# EAGLE board main_board_rv2 (EAGLE 9.6.2)
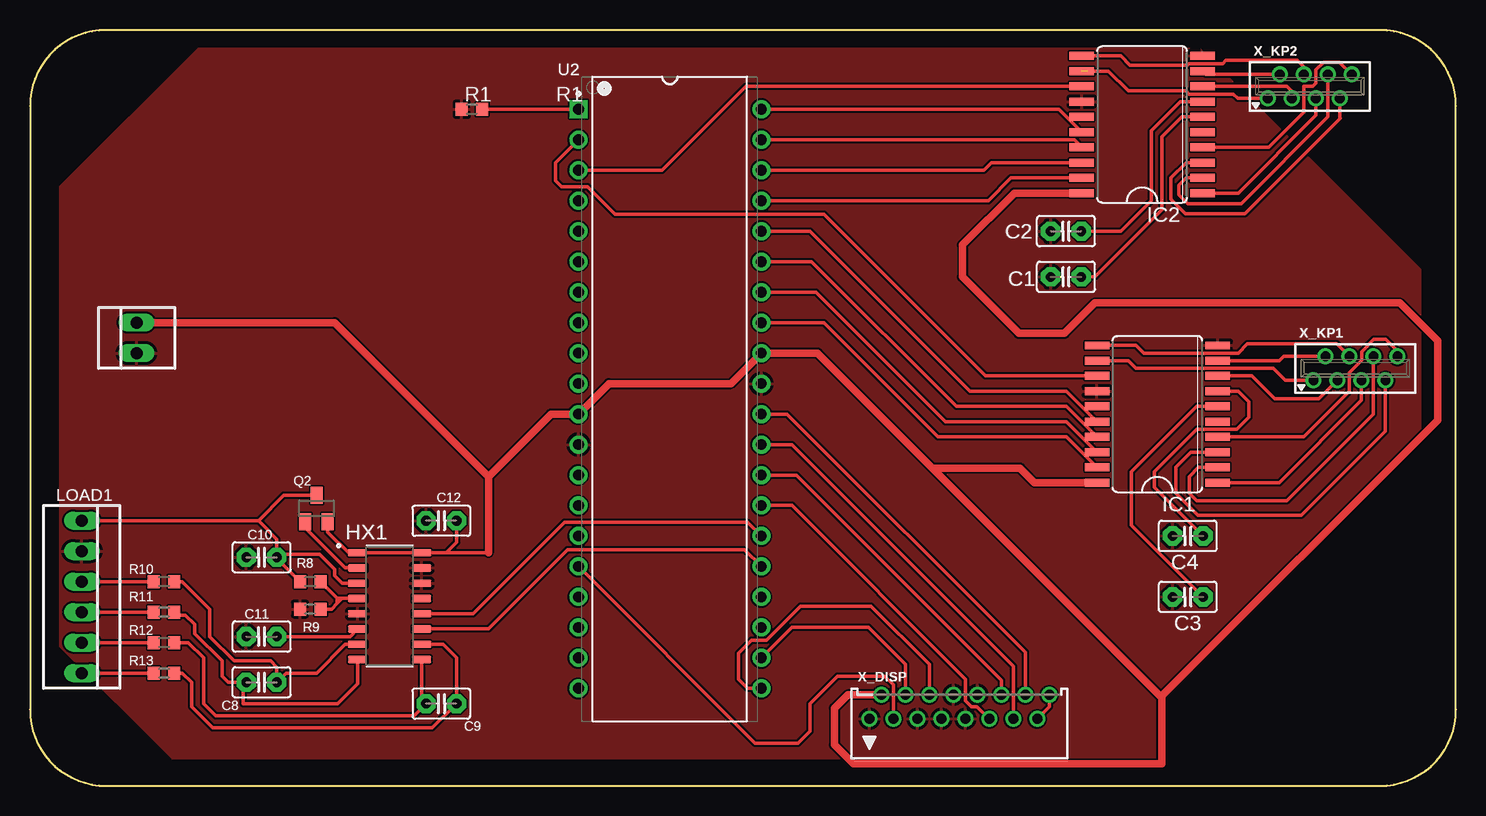
[diagram p0: board, top side]

Size 118.87 x 62.99 mm. Coordinates in mm from the lower left corner, seen from the top.
Outline: 112.52,62.99 6.35,62.99 arc90 0,56.64 0,6.35 arc90 6.35,0 112.52,0 arc90 118.87,6.35 118.87,56.64 arc90 112.52,62.99
Copper layers (1*16): Top 0.035mm / dielectric 1.5mm / Bottom 0.035mm
Design rules "default": minimum track width 6mil, minimum drill 0.35mm, track to track 6mil, track to pad 6mil, pad to pad 6mil, via to via 6mil, smd to smd 6mil, copper to edge 40mil, drill to drill 6mil, minimum pad ring 10mil, minimum via ring 8mil, stop-mask expansion 4mil, vias tented up to drill 0mil, thermal gap 10mil

## Footprints (pad centres in the part's own frame; a part is rotated, then mirrored left to right if it is on the bottom)
C2.5-2 = drill 0.813 pad 1.6 octagon: 1 -1.27,0; 2 1.27,0
SOP127P600X180-16N = smd 1.58 x 0.59: 1 -2.67,4.445; 2 -2.67,3.175; 3 -2.67,1.905; 4 -2.67,0.635; 5 -2.67,-0.635; 6 -2.67,-1.905; 7 -2.67,-3.175; 8 -2.67,-4.445; 9 2.67,-4.445; 10 2.67,-3.175; 11 2.67,-1.905; 12 2.67,-0.635; 13 2.67,0.635; 14 2.67,1.905; 15 2.67,3.175; 16 2.67,4.445
SO20W = smd 0.66 x 2.032: 1 -5.715,-5.029; 2 -4.445,-5.029; 3 -3.175,-5.029; 4 -1.905,-5.029; 5 -0.635,-5.029; 6 0.635,-5.029; 7 1.905,-5.029; 8 3.175,-5.029; 9 4.445,-5.029; 10 5.715,-5.029; 11 5.715,5.029; 12 4.445,5.029; 13 3.175,5.029; 14 1.905,5.029; 15 0.635,5.029; 16 -0.635,5.029; 17 -1.905,5.029; 18 -3.175,5.029; 19 -4.445,5.029; 20 -5.715,5.029
22-23-2061 = drill 1 long: 1 -6.35,0; 2 -3.81,0; 3 -1.27,0; 4 1.27,0; 5 3.81,0; 6 6.35,0
SOT23 = smd 1 x 1.4: 1 -0.95,-1.1; 2 0.95,-1.1; 3 0,1.1
R0603 = smd 1 x 1.1: 1 -0.85,0; 2 0.85,0
MICROCHIP_PIC18F46K20-I-P_0 = drill 0.9 pad 1.5 square: 1 -7.62,24.13 | drill 0.9 pad 1.5: 2 -7.62,21.59; 3 -7.62,19.05; 4 -7.62,16.51; 5 -7.62,13.97; 6 -7.62,11.43; 7 -7.62,8.89; 8 -7.62,6.35; 9 -7.62,3.81; 10 -7.62,1.27; 11 -7.62,-1.27; 12 -7.62,-3.81; 13 -7.62,-6.35; 14 -7.62,-8.89; 15 -7.62,-11.43; 16 -7.62,-13.97; 17 -7.62,-16.51; 18 -7.62,-19.05; 19 -7.62,-21.59; 20 -7.62,-24.13; 21 7.62,-24.13; 22 7.62,-21.59; 23 7.62,-19.05; 24 7.62,-16.51; 25 7.62,-13.97; 26 7.62,-11.43; 27 7.62,-8.89; 28 7.62,-6.35; 29 7.62,-3.81; 30 7.62,-1.27; 31 7.62,1.27; 32 7.62,3.81; 33 7.62,6.35; 34 7.62,8.89; 35 7.62,11.43; 36 7.62,13.97; 37 7.62,16.51; 38 7.62,19.05; 39 7.62,21.59; 40 7.62,24.13
FH21-16S-1DS = drill 0.813: 1 -7.5,0; 2 -6.5,2; 3 -5.5,0; 4 -4.5,2; 5 -3.5,0; 6 -2.5,2; 7 -1.5,0; 8 -0.5,2; 9 0.5,0; 10 1.5,2; 11 2.5,0; 12 3.5,2; 13 4.5,0; 14 5.5,2; 15 6.5,0; 16 7.5,2
FH21-8S-1DSA = drill 0.813: 1 -3.5,-1; 2 -2.5,1; 3 -1.5,-1; 4 -0.5,1; 5 0.5,-1; 6 1.5,1; 7 2.5,-1; 8 3.5,1
22-23-2021 = drill 1 long: 1 -1.27,0; 2 1.27,0

## Placement (x,y rotation side)
C1  0.1uF  [C2.5-2]  86.36,42.42 180 top
C2  1 uF  [C2.5-2]  86.36,46.23 180 top
C3  0.1uF  [C2.5-2]  96.52,15.75 180 top
C4  1 uF  [C2.5-2]  96.52,20.83 180 top
C8  0.1uF  [C2.5-2]  19.3,8.64 180 top
C9  0.1uF  [C2.5-2]  34.29,6.86 0 top
C10  10uF  [C2.5-2]  19.3,19.05 180 top
C11  0.1uF  [C2.5-2]  19.3,12.45 180 top
C12  10uF  [C2.5-2]  34.29,22.1 0 top
HX1  HX711  [SOP127P600X180-16N]  29.97,14.99 0 top
IC1  74C922M  [SO20W]  93.98,30.99 90 top
IC2  74C922M  [SO20W]  92.71,55.12 90 top
LOAD1  [22-23-2061]  4.32,15.75 270 top
Q2  [SOT23]  23.88,23.11 0 top
R1  1k  [R0603]  36.83,56.39 0 top
R8  20K  [R0603]  23.37,17.02 0 top
R9  8.2K  [R0603]  23.37,14.73 0 top
R10  100  [R0603]  11.18,17.02 0 top
R11  100  [R0603]  11.18,14.48 0 top
R12  100  [R0603]  11.18,11.94 0 top
R13  100  [R0603]  11.18,9.4 0 top
U2  MICROCHIP_PIC18F46K20-I-PMICROCHIP_PIC18F46K20-I-P_0_0  [MICROCHIP_PIC18F46K20-I-P_0]  53.34,32.26 0 top
X_DISP  FH21-16S-1DS  [FH21-16S-1DS]  77.47,5.59 0 top
X_KP1  FH21-8S-1DSA  [FH21-8S-1DSA]  110.49,34.8 0 top
X_KP2  FH21-8S-1DSA  [FH21-8S-1DSA]  106.68,58.29 0 top
X_POWER  22-23-2021  [22-23-2021]  8.89,37.34 90 top

## Library data of the parts
C1-C4 C8-C12 = capacitor-wima
HX1 = HX711ss; AVAILABILITY: Not in stock; DESCRIPTION: Precision 24-bit analog-to-digital converter (ADC) designed for weigh scales and industrial control applications to interface directly with a bridge sensor.; MF: AVIA SEMICONDUCTOR; MP: HX711; PACKAGE: None; PRICE: None
IC1 IC2 = 74xx-eu_ff
LOAD1 = con-molex; MF: MOLEX; MPN: 22-23-2061; OC_FARNELL: 1462922; OC_NEWARK: 27C1933
Q2 = semicon-smd-ipc
R1 R8-R13 = rcl; SPICEPREFIX: R
U2 = P; CIIVA_IDS: 1156701; DATASHEET_VERSION: revF, Sep-2009; FOOTPRINT_VARIANT_NAME_0: Manufacturer Recommended; IMPORTED: yes; IMPORTED_FROM: vault; IMPORT_TS: 1521846864; MF: Microchip; MPN: PIC18F46K20-I/P; PACKAGE: PDIP600-P40; PACKAGE_DESCRIPTION: 40-Lead Plastic Dual In-Line (P) - 600 mil Body [PDIP]; PACKAGE_VERSION: revBB, Aug-2009; PREFIX: U; RELEASE_DATE: 1300262623; VAULT_GUID: 62ADF5D1-6D2B-4FDE-90F0-0F8BF26695C1; VAULT_REVISION: 3C46FF8B-A334-4966-A067-8205D2A13521
X_DISP X_KP1 X_KP2 = con-hirose; OC_FARNELL: unknown; OC_NEWARK: unknown
X_POWER = con-molex; MF: MOLEX; MPN: 22-23-2021; OC_FARNELL: 1462926; OC_NEWARK: 25C3832

## Nets
+5V: C12.2 HX1.1 HX1.16 IC1.20 IC2.20 Q2.2 U2.11 U2.32 X_DISP.2 X_POWER.2
A+: LOAD1.4 R11.1
A-: LOAD1.3 R10.1
AVDD: C10.1 HX1.3 LOAD1.1 Q2.3 R8.1
B+: LOAD1.6 R13.1
B-: LOAD1.5 R12.1
CNTRST: U2.16 X_DISP.3
D4: U2.27 X_DISP.11
D5: U2.28 X_DISP.12
D6: U2.29 X_DISP.13
D7: U2.30 X_DISP.14
DT: HX1.12 U2.26
E: U2.21 X_DISP.6
GND: C1.2 C2.2 C3.2 C4.2 C10.2 C11.2 C12.1 HX1.5 HX1.14 HX1.15 IC1.10 IC1.14 IC2.10 IC2.14 LOAD1.2 R1.1 R9.1 U2.12 U2.31 X_DISP.1 X_DISP.5 X_DISP.7 X_DISP.8 X_DISP.9 X_DISP.10 X_POWER.1
N$1: HX1.2 Q2.1
N$2: IC2.12 X_KP2.1
N$3: IC2.9 X_KP2.2
N$4: IC2.8 X_KP2.3
N$5: IC2.11 X_KP2.4
N$6: IC2.1 X_KP2.5
N$7: IC2.2 X_KP2.6
N$8: IC2.3 X_KP2.7
N$9: IC2.4 X_KP2.8
N$10: IC1.12 X_KP1.1
N$11: IC1.16 U2.36
N$12: IC1.9 X_KP1.2
N$13: IC1.8 X_KP1.3
N$14: IC1.11 X_KP1.4
N$15: HX1.4 R8.2 R9.2
N$16: IC1.17 U2.35
N$17: IC1.18 U2.34
N$18: IC1.19 U2.33
N$19: IC2.19 U2.37
N$20: IC2.18 U2.38
N$21: IC2.17 U2.39
N$22: IC2.16 U2.40
N$23: IC1.1 X_KP1.5
N$24: IC1.2 X_KP1.6
N$25: IC1.3 X_KP1.7
N$26: IC1.4 X_KP1.8
N$27: R1.2 U2.1
N$28: C1.1 IC2.6
N$29: C2.1 IC2.7
N$30: C3.1 IC1.6
N$31: C4.1 IC1.7
N$37: C11.1 HX1.6
N$38: C8.1 HX1.7 R10.2
N$39: C8.2 HX1.8 R11.2
N$40: C9.1 HX1.9 R12.2
N$41: C9.2 HX1.10 R13.2
N$45: IC1.13 U2.2
N$60: IC2.13 U2.3
NC: X_DISP.15 X_DISP.16
RS: U2.22 X_DISP.4
SCK: HX1.11 U2.25

## Tracks (layer width: path | path; a pad name or v marks a point on that pad's centre or on a via)
+5V
  Top 0.305: Q2.2 24.83,21.15 26.54,19.43 HX1.1 HX1.16 34.67,19.43 | C12.2 35.56,20.32 34.67,19.43 | 38.23,19.43 34.67,19.43
  Top 0.61: X_POWER.2 25.4,38.61 38.23,25.78 | 38.23,25.78 38.23,19.43 | 38.23,25.78 43.43,30.99 U2.11 48.26,33.53 58.42,33.53 U2.32 65.66,36.07 75.25,26.48 | X_DISP.2 68.17,7.59 67.06,6.48 67.06,3.43 68.66,1.83 94.36,1.83 94.36,7.37 | 94.36,7.37 94.36,7.49 117.35,30.48 117.35,37.08 114.17,40.26 88.77,40.26 86.23,37.72 82.42,37.72 77.72,42.42 77.72,45.09 82.04,49.4 IC2.20 | 94.36,7.37 75.25,26.48 | IC1.20 83.74,25.27 82.54,26.48 75.25,26.48
A+
  Top 0.305: LOAD1.4 R11.1
A-
  Top 0.305: LOAD1.3 R10.1
AVDD
  Top 0.152: 19.05,22.1 19.18,21.97
  Top 0.305: LOAD1.1 19.05,22.1 21.17,24.21 Q2.3 | R8.1 20.66,18.88 | 20.66,18.88 20.57,18.96 C10.1 20.57,20.57 19.18,21.97 | HX1.3 26.04,16.89 25.4,17.53 25.4,18.03 24.13,19.3 21.08,19.3 20.66,18.88
B+
  Top 0.305: LOAD1.6 R13.1
B-
  Top 0.305: LOAD1.5 R12.1
CNTRST
  Top 0.305: X_DISP.3 71.97,8.42 71.25,9.14 67.31,9.14 65.02,6.86 65.02,4.57 64.01,3.56 60.45,3.56 U2.16
D4
  Top 0.305: X_DISP.11 78.95,6.6 78.49,6.6 77.98,7.11 77.98,8.89 63.5,23.37 U2.27
D5
  Top 0.305: U2.28 63.88,25.91 80.97,8.82 X_DISP.12
D6
  Top 0.305: X_DISP.13 81.97,9.96 | 81.97,9.96 81.98,9.97 | 81.97,9.96 81.97,9.98 63.5,28.45 U2.29
D7
  Top 0.305: X_DISP.14 82.97,11.14 63.12,30.99 U2.30
DT
  Top 0.305: U2.26 59.82,21.97 44.58,21.97 36.96,14.35 HX1.12
E
  Top 0.305: X_DISP.6 74.97,10.12 70.1,14.99 64.23,14.99 61.4,12.15 60.16,12.15 59.06,11.05 59.06,8.89 59.82,8.13 U2.21
GND
  Top 0.305: HX1.14 32.77,17.02
  pour Top: 32,23.11 6.6,23.11 4.06,20.57 4.06,15.24 6.86,12.45 32.51,12.45 33.78,13.72 33.78,21.34
  pour Top: 2.54,11.61 2.54,49.96 14.05,61.47 97.49,61.47 115.9,43.05 115.9,2.26 11.89,2.26
N$1
  Top 0.305: HX1.2 26.29,18.16 22.93,21.52 Q2.1
N$2  (1 unrouted)
  Top 0.305: X_KP2.1 100.7,57.29 100.33,57.66 96.6,57.66 96.34,57.91 91.57,57.91 89.92,59.56 88.14,59.56
N$3
  Top 0.305: X_KP2.2 98.01,59.29 IC2.9
N$4
  Top 0.305: X_KP2.3 105.16,57.32 105.16,57.91 104.78,58.29 IC2.8
N$5
  Top 0.305: X_KP2.4 106.17,59.94 105.66,60.45 99.7,60.45 99.44,60.2 96.6,60.2 96.47,60.07 91.69,60.07 90.93,60.83 IC2.11
N$6
  Top 0.305: X_KP2.5 107.18,55.89 107.19,55.88 100.71,49.4 IC2.1
N$7
  Top 0.305: X_KP2.6 108.18,55.78 108.2,55.75 100.97,48.51 96.52,48.51 95.76,49.28 95.76,50.04 96.39,50.67 IC2.2
N$8
  Top 0.305: X_KP2.7 109.18,55.67 109.22,55.63 101.28,47.69 96.33,47.69 95.12,48.89 95.12,50.67 96.39,51.94 IC2.3
N$9
  Top 0.305: X_KP2.8 109.15,60.32 107.85,60.32 107.19,59.67 107.19,58.55 106.93,58.29 106.17,58.29 106.17,56.13 103.25,53.21 IC2.4
N$10
  Top 0.305: X_KP1.1 104.63,33.8 103.63,34.8 92.2,34.8 91.57,35.43 IC1.12
N$11
  Top 0.305: IC1.16 86.41,32.89 78.36,32.89 65.02,46.23 U2.36
N$12
  Top 0.305: 99.57,35.43 IC1.9 104.14,35.43 104.51,35.8 X_KP1.2
N$13
  Top 0.305: X_KP1.3 107.45,32.26 103.76,32.26 101.85,34.16 IC1.8
N$14
  Top 0.305: X_KP1.4 108.96,36.83 101.47,36.83 100.71,36.07 92.84,36.07 92.2,36.7 IC1.11
N$15
  Top 0.305: R9.2 25.15,14.73 25.61,15.2 | 26.04,15.62 HX1.4 | 25.61,15.2 26.04,15.62 | R8.2 25.61,15.62 | 25.61,15.62 26.04,15.62 | 25.61,15.62 25.61,15.2
N$16
  Top 0.305: IC1.17 86.41,31.62 77.22,31.62 65.15,43.69 U2.35
N$17
  Top 0.305: IC1.18 86.41,30.35 76.33,30.35 65.53,41.15 U2.34
N$18
  Top 0.305: IC1.19 86.41,29.08 75.69,29.08 66.17,38.61 U2.33
N$19
  Top 0.305: IC2.19 81.79,50.67 79.88,48.77 U2.37
N$20
  Top 0.305: IC2.18 80.14,51.94 79.5,51.31 U2.38
N$21
  Top 0.305: IC2.17 87.05,53.85 U2.39
N$22
  Top 0.305: IC2.16 85.78,56.39 U2.40
N$23
  Top 0.305: IC1.1 104.14,25.27 111,32.13 110.99,32.14 X_KP1.5
N$24
  Top 0.305: X_KP1.6 111.99,30.96 104.78,23.75 97.28,23.75 96.65,24.38 96.65,25.78 97.41,26.54 IC1.2
N$25
  Top 0.305: 112.89,33.8 X_KP1.7 112.99,29.55 105.98,22.54 97.34,22.54 95.5,24.38 95.5,26.54 96.77,27.81 IC1.3
N$26
  Top 0.305: X_KP1.8 113.99,36.25 113.03,37.21 112.04,37.21 111.03,36.2 111.03,35.46 109.98,34.42 109.98,32.89 106.17,29.08 IC1.4
N$27
  Top 0.305: U2.1 R1.2
N$28
  Top 0.305: IC2.6 96.01,55.75 94.36,54.1 94.36,48.01 88.77,42.42 C1.1
N$29
  Top 0.305: IC2.7 95.89,57.02 93.47,54.61 93.47,48.77 90.93,46.23 C2.1
N$30
  Top 0.305: IC1.6 97.28,31.62 91.82,26.16 91.82,21.72 C3.1
N$31
  Top 0.305: C4.1 93.73,24.89 93.73,26.16 97.28,29.72 100.58,29.72 101.6,30.73 101.6,32 100.71,32.89 IC1.7
N$37
  Top 0.305: HX1.6 26.67,12.45 C11.1
N$38
  Top 0.305: R10.2 12.7,17.02 14.99,14.73 14.99,12.45 17.02,10.41 20.07,10.41 20.57,9.91 C8.1 21.34,9.4 23.88,9.4 26.29,11.81 HX1.7
N$39
  Top 0.305: R11.2 12.28,14.22 12.95,14.22 13.72,13.46 13.72,12.7 16,10.41 16,9.14 16.51,8.64 C8.2 17.78,8.38 17.78,6.86 25.65,6.86 27.3,8.51 HX1.8
N$40
  Top 0.305: R12.2 13.21,11.94 14.48,10.67 14.48,6.86 15.49,5.84 32,5.84 C9.1 32.64,7.24 HX1.9
N$41
  Top 0.305: R13.2 12.7,9.4 13.46,8.64 13.46,6.6 15.24,4.83 33.53,4.83 C9.2 35.56,10.67 34.42,11.81 HX1.10
N$45
  Top 0.305: IC1.13 79.63,34.16 66.17,47.62 48.77,47.62 46.48,49.91 44.32,49.91 43.81,50.42 43.81,51.94 U2.2
N$60
  Top 0.305: IC2.13 59.69,58.29 52.7,51.31 U2.3
NC
  Top 0.305: X_DISP.16 84.97,6.59 X_DISP.15
RS
  Top 0.305: X_DISP.4 72.97,10.13 69.89,13.21 63.5,13.21 U2.22
SCK
  Top 0.305: U2.25 59.56,19.69 44.83,19.69 38.23,13.08 HX1.11

## Text on the board
_tNames: X_KP2 | U2 | R1 | IC2 | C2 | C1 | X_KP1 | Q2 | LOAD1 | C12 | IC1 | C10 | HX1 | C4 | R10 | R8 | R11 | C11 | C3 | R12 | R9 | R13 | X_DISP | C8 | C9